# Altium PCB sincronico.PcbDoc
Units mm, origin at the board's own origin, x right, y up, seen from the top; angles counter-clockwise.
Board outline 100 x 50 mm, 2 copper layers (Top Layer, Bottom Layer); 7 components, 12 nets, 97 pads, 2 vias.
Unrouted connection lines stored in the file: 6.
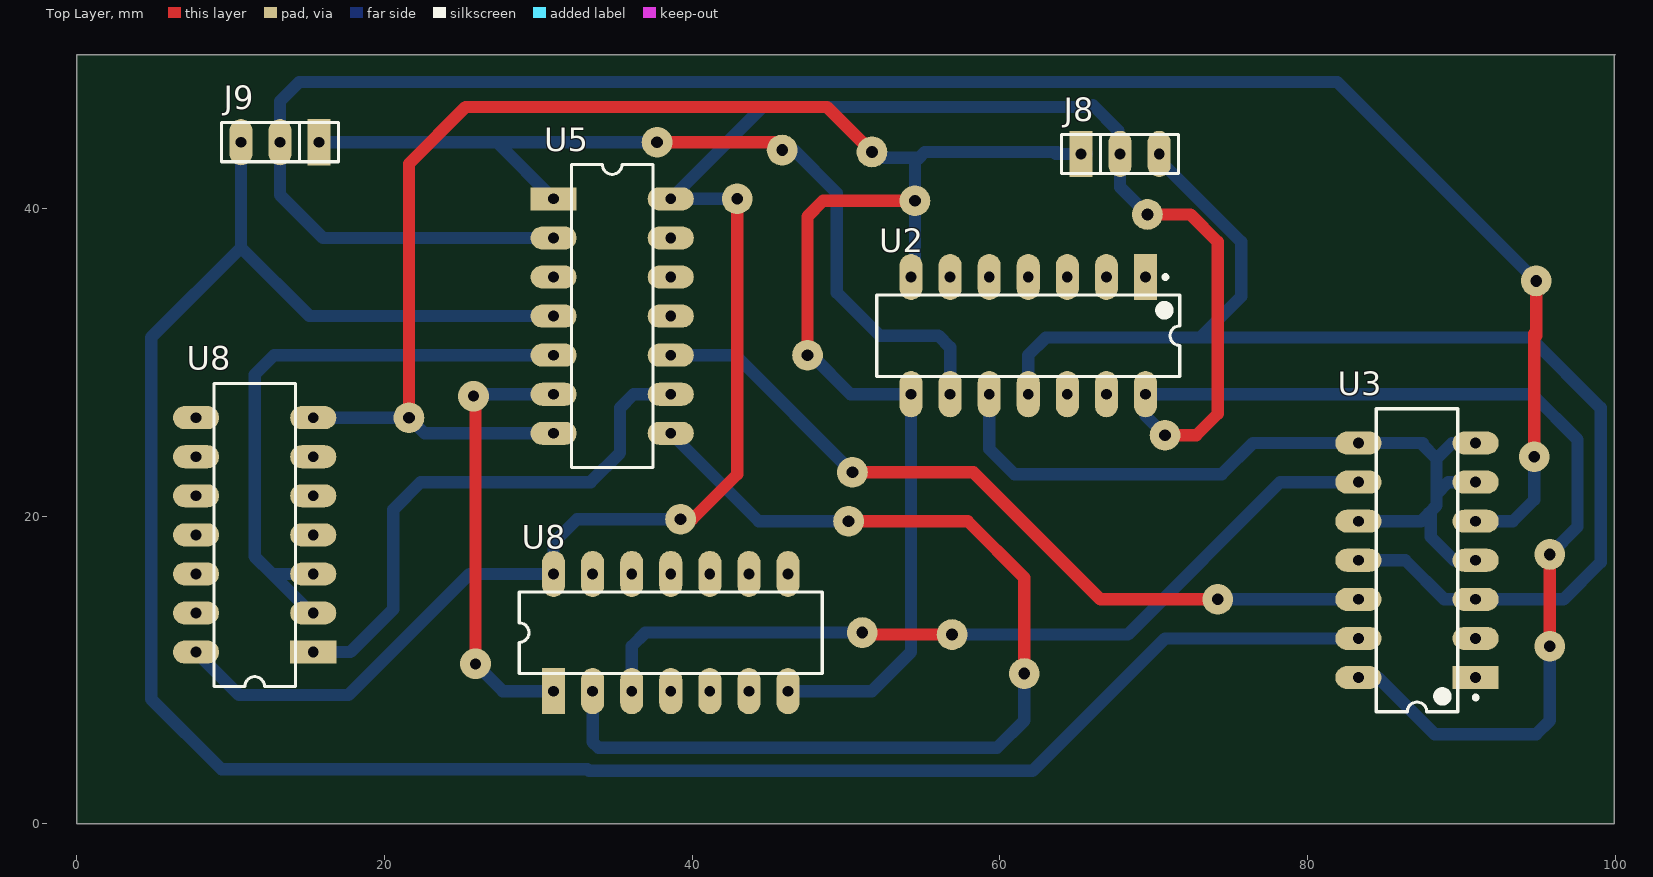
[diagram p0: Top Layer view]
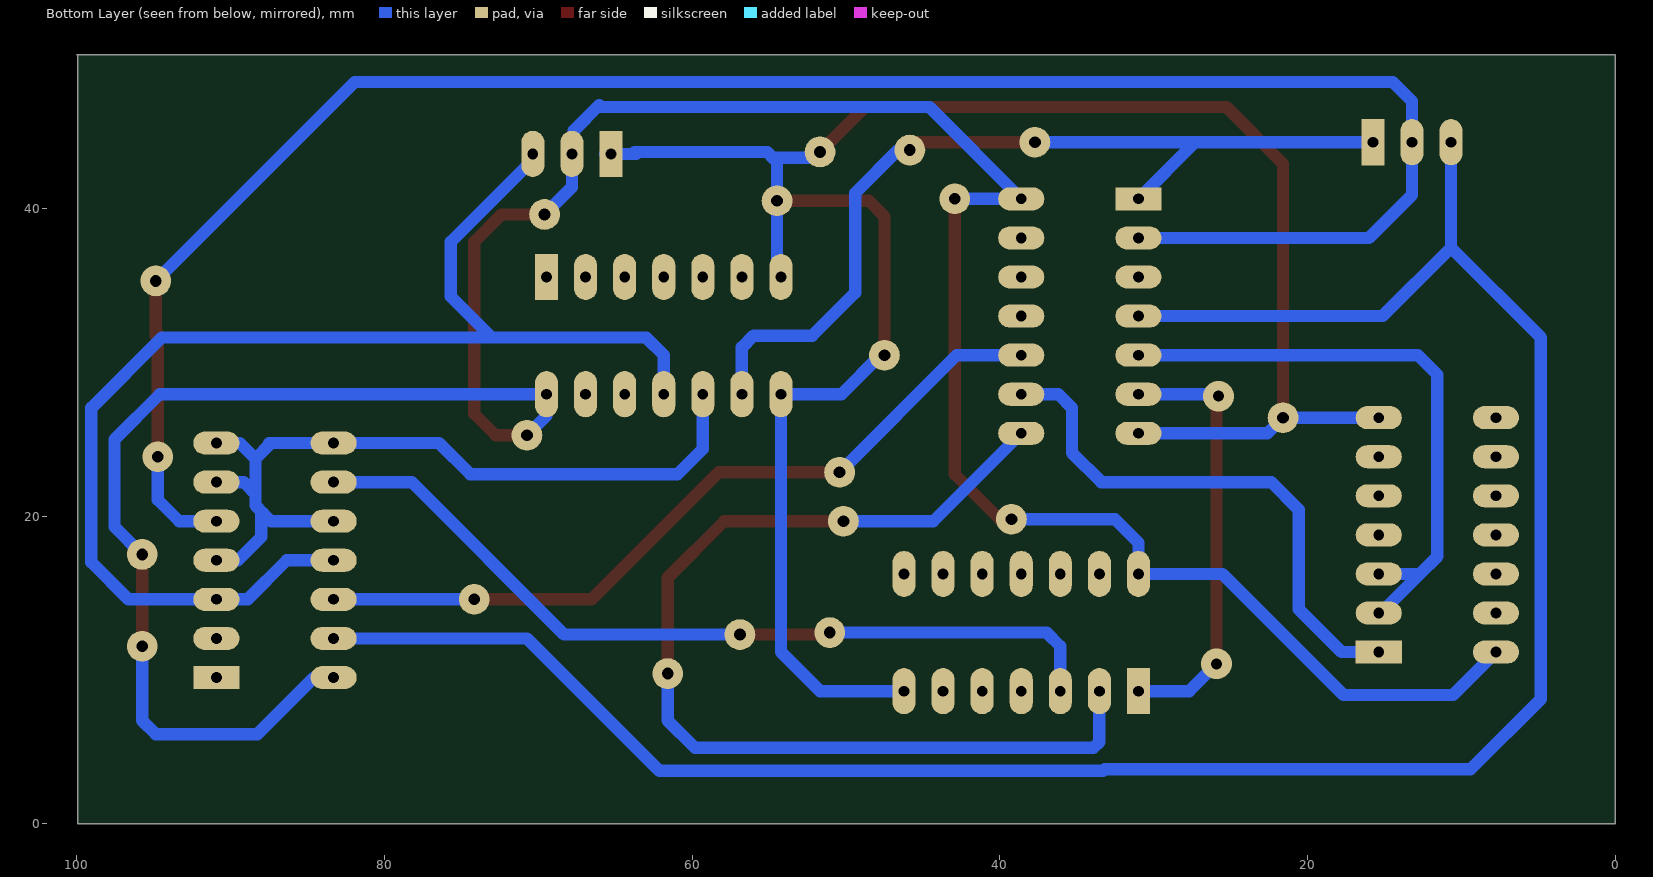
[diagram p1: Bottom Layer view, seen from below]

## Layer stack, top to bottom
Top Solder: solder mask 0.0102, Solder Resist, Dk 3.5
Top Layer: signal copper 0.0356
Dielectric 1: dielectric 0.32, FR-4, Dk 4.8
Bottom Layer: signal copper 0.0356
Bottom Solder: solder mask 0.0102, Solder Resist, Dk 3.5

## Board outline
0,0 99.949,0 99.949,49.949 100,50 0,50 0,0

## Design rules (kind name [scope] priority, off if disabled: settings)
Clearance [All] p1: gap=0.7
PolygonConnect [All] p1: connectstyle=Relief reliefconductorwidth=0.254 reliefentries=4 polygonreliefangle="90 Angle" airgapwidth=0.254
RoutingVias [All] p1: holewidth=0.711 width=2 viastyle="Through Hole" minholewidth=0.711 minwidth=2 maxholewidth=0.711 maxwidth=2
SolderMaskExpansion [All] p1: expansion=0.102
Width [All] p1: maxlimit=0.8 minlimit=0.8 preferedwidth=0.8
30 further rules are at their usual default settings.

## Classes and differential pairs
component class sincronico: J8 J9 U2 U3 U5 U8

## Components (designator, comment, footprint, x,y, rotation, side; value= is the part's Value field where it differs from the comment)
J8 "CON3" SIP3 67.818,43.561 r0 top
J9 "CON3" SIP3 13.208,44.323 r180 top
U2 "CD4013BCN" N14A 61.849,31.75 r270 top
U3 "CD4013BCN" N14A 87.122,17.145 r180 top
U5 "MC74HC08AN" 646-06 34.798,33.02 r270 top
U8 "MC74HC02AN" 646-06 11.557,18.796 r90 top
U8 "MC74HC32AN" 646-06 38.608,12.446 r0 top

## Footprints (in the part's own frame and the unit in brackets; to place one, negate y for a bottom-side part, rotate by r counter-clockwise, add the part's x,y. Pads: shape width x height; smd on the part's side, far side on the other; paste and mask are expansions set on the pad)
646-06 [mm] "DIP; 14 Leads; Row Spacing 7.62 mm; Pitch 2.54 mm"
  rect 1.5x3 hole 0.7: 1(-7.62,-3.81)
  oval 1.5x3 hole 0.7: 2(-5.08,-3.81) 3(-2.54,-3.81) 4(0,-3.81) 5(2.54,-3.81) 6(5.08,-3.81) 7(7.62,-3.81) 8(7.62,3.81) 9(5.08,3.81) 10(2.54,3.81) 11(0,3.81) 12(-2.54,3.81) 13(-5.08,3.81) 14(-7.62,3.81)
  silkscreen extent -9.85,-2.65 9.85,2.65
N14A [mm] "DIP, 14-Leads, Row Spacing 7.62mm, Pitch 2.54mm, Body 19.18x6.35mm"
  rect 3x1.5 hole 0.7: 1(-3.81,7.62)
  oval 3x1.5 hole 0.7: 2(-3.81,5.08) 3(-3.81,2.54) 4(-3.81,0) 5(-3.81,-2.54) 6(-3.81,-5.08) 7(-3.81,-7.62) 8(3.81,-7.62) 9(3.81,-5.08) 10(3.81,-2.54) 11(3.81,0) 12(3.81,2.54) 13(3.81,5.08) 14(3.81,7.62)
  silkscreen extent -3.93,-9.85 2.65,9.85, body extent -3.55,-9.85 3.55,9.85, height 5.08
SIP3 [mm]
  rect 1.5x3 hole 0.7: 1(-2.54,0)
  oval 1.5x3 hole 0.7: 2(0,0) 3(2.54,0)
  silkscreen extent -3.81,-1.27 3.81,1.27, body extent -3.81,-1.3 3.81,1.24, height 8.38

## Part data
U2 U3: "Dual D-Type Flip-Flop"
U5: "Quad 2-Input AND Gate"
U8: "Quad 2-Input NOR Gate"
U8: "Quad 2-Input OR Gate"

## Free pads (board coordinates)
  round 2 hole 0.762: 7(56.896,12.319) 8(51.054,12.446) 9(37.719,44.323) 10(45.847,43.815) 11(50.419,22.86) 12(74.168,14.605) 13(50.165,19.685) 15(61.595,9.779) 16(95.758,17.526) 18(95.758,11.557) 19(94.742,23.876) 20(94.869,35.306) 21(39.243,19.812) 23(42.926,40.64) 24(70.739,25.273) 25(69.596,39.624) 26(47.498,30.48) 27(51.689,43.688) 28(21.59,26.416) 29(21.59,26.416) 30(54.483,40.513)

## Via types
v1: diameter 2, hole 0.711, Top Layer to Bottom Layer, 2 vias

## Nets (pads, with @x,y where several pads share a name; then routed paths per layer and width w, separated by ;. In a path a pad name is that pad's centre, name@x,y a point inside that pad or via, vN(x,y) a via of type N, cw(c..) or ccw(c..) an arc to the next point about the centre after c; other vN are vias at no path point)
CLK: J8.3 U2.11 U3.3 U3.11 | length 83.7
  Bottom Layer w0.8: U2.11 61.849,30.48 62.992,31.623 73.025,31.623 ; J8.3@70.231,43.307 75.692,37.846 75.692,34.29 73.025,31.623 ; U3.11@84.582,17.145 86.36,17.145 88.9,14.605 92.202,14.605 96.647,14.605 99.06,17.018 99.06,27.051 94.488,31.623 73.025,31.623
GND: J8.1 pad.26 pad.27 pad.28 pad.29 pad.30 U2.7 U2.8 U2.10 U3.4 U3.6 U3.7 U3.8 U3.10 U5.7 U8.7 | length 190.6
  Top Layer w0.8: pad.28 21.59,42.926 25.273,46.609 48.768,46.609 pad.27 ; pad.26 47.498,39.497 48.514,40.513 pad.30
  Bottom Layer w0.8: U8.7@15.367,26.416 pad.28 22.606,25.4 U5.7 ; U8.7@46.228,8.636 51.689,8.636 54.229,11.176 U2.8 50.292,27.94 pad.26@47.752,30.48 ; pad.27 52.07,43.307 54.737,43.307 ; U2.7 54.483,35.814 pad.30 54.483,43.053 54.737,43.307 ; U2.10 59.309,24.384 60.96,22.733 74.422,22.733 76.454,24.765 87.503,24.765 87.439,24.701 88.392,23.749 ; J8.1@65.659,43.561 63.627,43.561 63.754,43.688 55.118,43.688 54.737,43.307 ; U3.10@84.582,19.685 87.376,19.685 87.884,20.193 ; U3.4 89.535,17.145 88.011,18.669 88.011,20.066 87.884,20.193 ; U3.6 89.154,22.225 88.392,21.463 ; U3.7 89.408,24.765 88.392,23.749 ; 87.884,20.193 88.392,20.701 88.392,21.463 ; 88.392,21.463 88.392,23.749
NetU3_9: pad.7 pad.8 U3.9 U8.3@36.068,8.636 | length 54.5
  Top Layer w0.8: pad.8 51.181,12.319 pad.7
  Bottom Layer w0.8: U8.3@36.068,8.636 36.068,11.557 36.957,12.446 50.8,12.446 pad.8@51.054,12.7 ; pad.7@57.15,12.319 68.326,12.319 78.232,22.225 U3.9
NetU3_12: pad.11 pad.12 U3.12 U5.10 | length 51
  Top Layer w0.8: pad.11 58.293,22.86 66.548,14.605 pad.12
  Bottom Layer w0.8: U5.10 42.799,30.48 pad.11 ; pad.12@74.422,14.605 U3.12
NetU5_3: U5.3 U5.5 U8.2@15.367,13.716 U8.3@15.367,16.256 | length 39.8
  Bottom Layer w0.8: U8.2@15.367,13.716 15.24,13.716 12.7,16.256 ; U8.3@15.367,16.256 12.7,16.256 ; U5.5 12.827,30.48 11.557,29.21 11.557,17.399 12.7,16.256
NetU5_6: U5.6 U8.1@30.988,8.636 | length 28.2
  Top Layer w0.8: v1(25.781,27.813) 25.908,27.686 v1(25.908,10.414)
  Bottom Layer w0.8: v1(25.908,10.414) 27.686,8.636 U8.1@30.988,8.636 ; v1@26.035,27.94 U5.6
NetU5_8: pad.13 pad.15 U5.8 U8.2@33.528,8.636 | length 68.4
  Top Layer w0.8: pad.13 57.912,19.685 61.595,16.002 pad.15
  Bottom Layer w0.8: U8.2@33.528,8.636 33.528,5.334 33.909,4.953 59.817,4.953 61.595,6.731 pad.15 ; U5.8 44.323,19.685 pad.13
NetU5_9: U5.9 U8.1@15.367,11.176 | length 35.7
  Bottom Layer w0.8: U8.1@15.367,11.176 17.78,11.176 20.574,13.97 20.574,20.447 22.352,22.225 33.401,22.225 35.306,24.13 35.306,27.051 36.195,27.94 U5.9
Q0B: J9.1 pad.9 pad.10 U2.9 U2.12 U2.13 U5.1 | length 58.6
  Top Layer w0.8: pad.9 45.339,44.323 pad.10
  Bottom Layer w0.8: J9.1 27.305,44.323 ; U5.1 27.305,44.323 ; pad.9 27.305,44.323 ; pad.10 46.609,43.815 49.403,41.021 49.403,34.544 52.197,31.75 56.007,31.75 56.769,30.988 U2.9
Q1B: J9.2 pad.19 pad.20 U3.1 U3.2 U3.5 U5.2 | length 130.2
  Top Layer w0.8: pad.19 94.742,31.877 94.869,31.75 pad.20
  Bottom Layer w0.8: U5.2 16.002,38.1 13.208,40.894 J9.2 13.208,46.99 14.454,48.236 81.939,48.236 pad.20 ; U3.5@92.202,19.685 93.345,19.685 94.742,21.082 pad.19
Q2B: J9.3 U3.13 U5.4 | length 144.9
  Bottom Layer w0.8: J9.3 10.668,37.465 ; U5.4 15.113,33.02 10.668,37.465 ; U3.13@83.439,12.065 70.739,12.065 62.127,3.453 33.288,3.453 33.185,3.556 9.398,3.556 4.826,8.128 4.826,31.623 10.668,37.465
VDD: J8.2 pad.16 pad.18 pad.21 pad.23 pad.24 pad.25 U2.14 U3.14 U5.14 U8.14 | length 187.8
  Top Layer w0.8: pad.21 40.005,19.812 42.926,22.733 pad.23 ; pad.25 72.39,39.624 74.168,37.846 74.168,26.67 72.771,25.273 pad.24 ; pad.18 pad.16
  Bottom Layer w0.8: U8.14@7.747,11.176 10.541,8.382 17.653,8.382 25.527,16.256 30.988,16.256 30.988,18.288 32.512,19.812 pad.21 ; pad.23 U5.14 44.577,46.609 66.04,46.609 66.04,46.736 67.691,45.085 ; J8.2 67.818,41.402 pad.25 ; pad.24 69.469,26.543 U2.14 94.615,27.94 97.56,24.995 97.56,19.328 pad.16 ; U3.14@84.582,9.525 88.265,5.842 94.869,5.842 95.758,6.731 pad.18
pads on no net: U2.1 U2.2 U2.3 U2.4 U2.5 U2.6 U5.11 U5.12 U5.13 U8.4 U8.5 U8.6 U8.8 U8.9 U8.10 U8.11 U8.12 U8.13